# Altium PCB Main.PcbDoc
Units mm, origin at the board's own origin, x right, y up, seen from the top; angles counter-clockwise.
Board outline 42.29 x 27.05 mm, 2 copper layers (Top Layer, Bottom Layer); 18 components, 12 nets, 48 pads, 0 vias.
Unrouted connection lines stored in the file: 34.
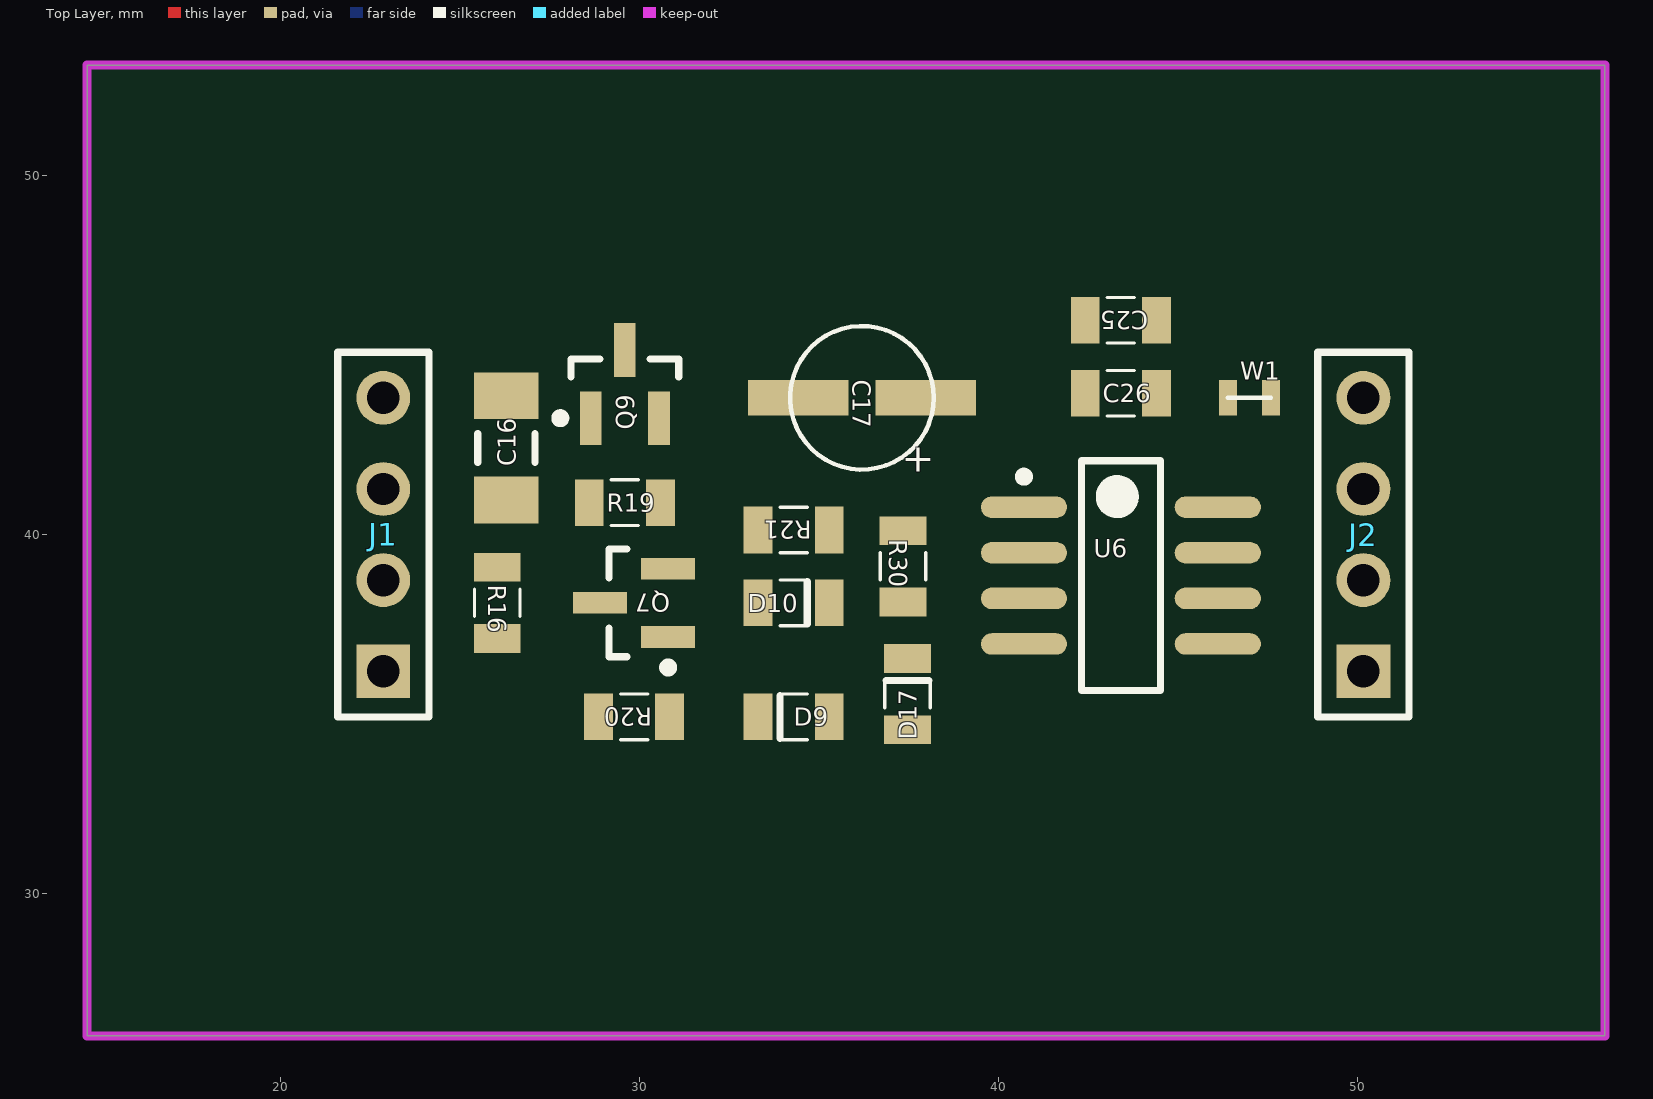
[diagram p0: Top Layer view]
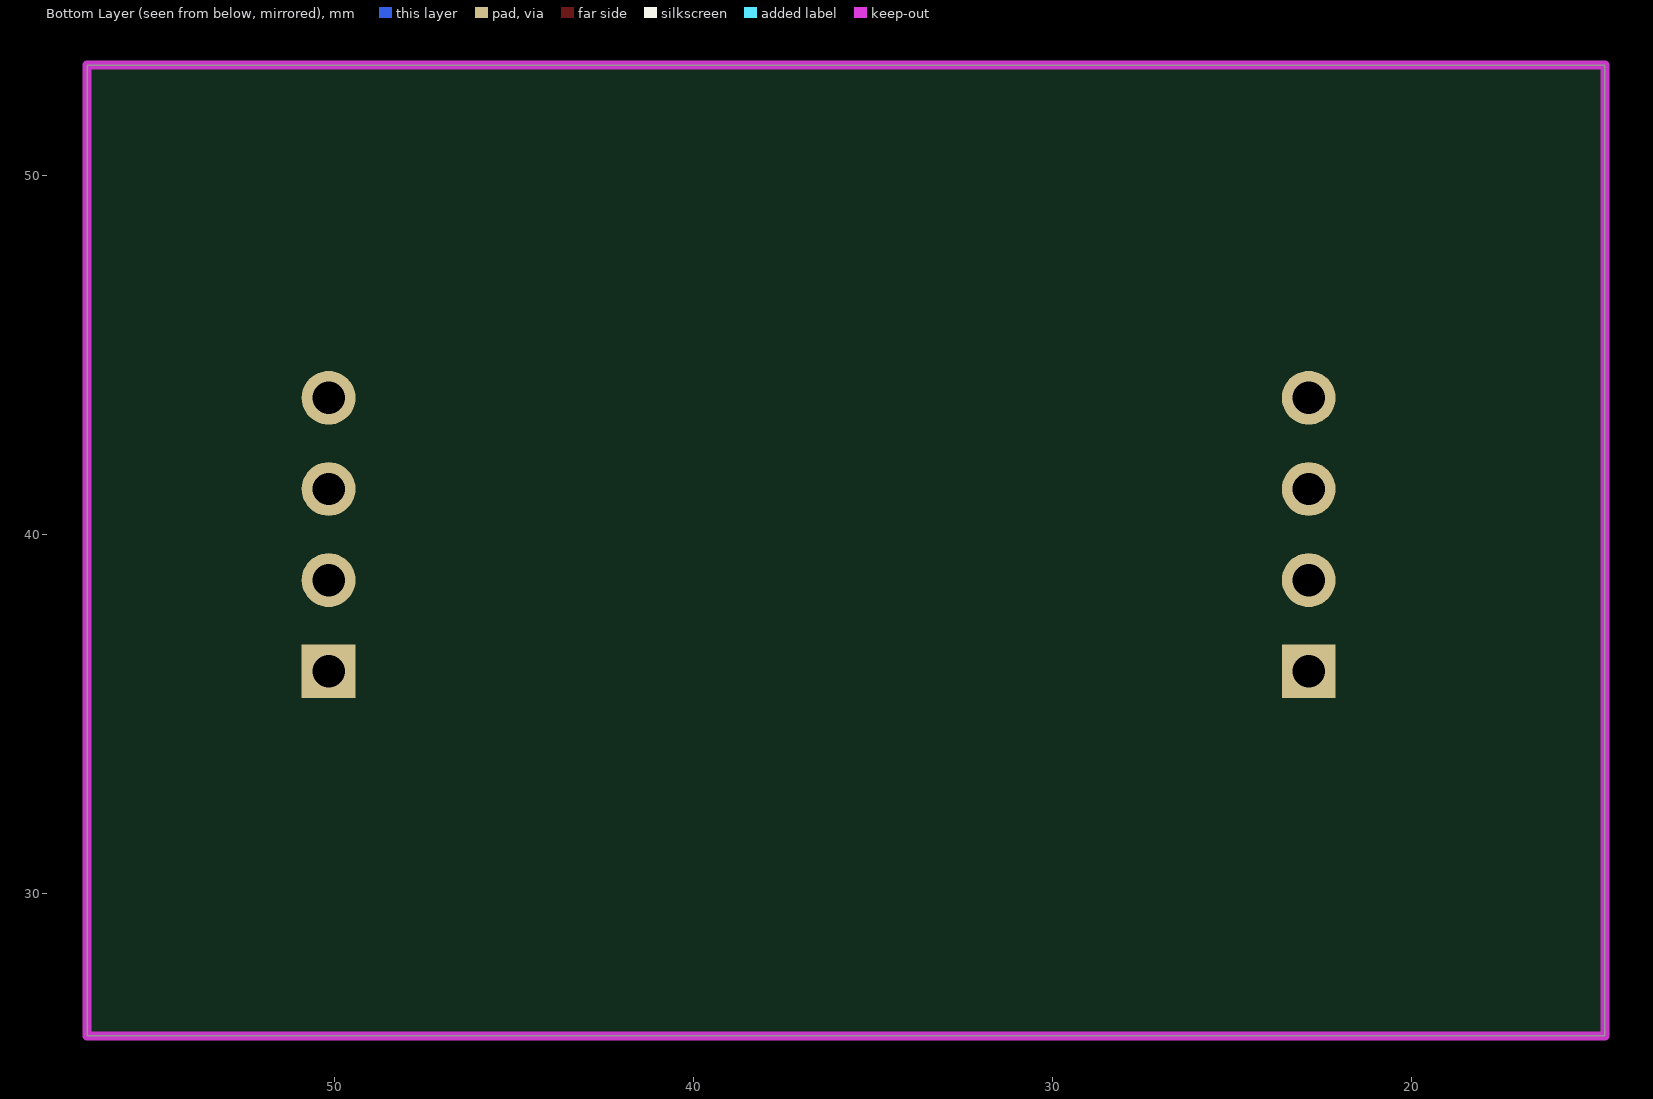
[diagram p1: Bottom Layer view, seen from below]

## Layer stack, top to bottom
Top Solder: solder mask 0.0102, Solder Resist, Dk 3.5
Top Layer: signal copper 0.0356
Dielectric 1: dielectric 0.32, FR-4, Dk 4.8
Bottom Layer: signal copper 0.0356
Bottom Solder: solder mask 0.0102, Solder Resist, Dk 3.5

## Board outline
14.605,26.035 56.896,26.035 56.896,53.086 14.605,53.086

## Design rules (kind name [scope] priority, off if disabled: settings)
Clearance [All] p1: gap=0.3
ComponentClearance [All] p1 off: gap=0 collisioncheckmode=3 verticalgap=0 showdistances=FALSE
Height [All] p1: minheight=0 maxheight=50 prefheight=12.7
PolygonConnect [All] p1: connectstyle=Relief reliefconductorwidth=0.254 reliefentries=4 polygonreliefangle="90 Angle" airgapwidth=0.254
RoomDefinition Main1 [InComponentClass('Main1')] p1: confinementstyle=ConfineIn formatcopy=TRUE lockcomponents=FALSE outline 21.565,30.734 49.759,30.734 49.759,48.006 21.565,48.006
RoutingVias [All] p1: holewidth=0.711 width=1.27 viastyle="Through Hole" minholewidth=0.711 minwidth=1.27 maxholewidth=0.711 maxwidth=1.27
SolderMaskExpansion [All] p1: expansion=0.102
Width [All] p1: maxlimit=0.3 minlimit=0.3 preferedwidth=0.3
28 further rules are at their usual default settings.

## Components (designator, comment, footprint, x,y, rotation, side; value= is the part's Value field where it differs from the comment)
C16 "220nF" RESC3216N 26.289,42.418 r90 top
C17 "22uF" Cap_B 36.195,43.815 r180 top
C25 "1uF" 0805 43.409,45.974 r0 top
C26 "100nF" 0805 43.409,43.942 r0 top
D9 "YELLOW" 0805_Diode 34.29,34.925 r180 top
D10 "Diode" 0805_Diode 34.29,38.1 r0 top
D17 "1N4148" 0805_Diode 37.465,35.56 r90 top
J1 "4PIN" HDR1X4 22.86,36.195 r90 top
J2 "4PIN" HDR1X4 50.165,36.195 r90 top
Q7 "NPN" SOT23-3N 29.845,38.1 r180 top
Q9 "BC847" SOT23-3N 29.591,44.196 r90 top
R16 "10K" 0805 26.035,38.1 r270 top
R19 "4.7K" 0805 29.591,40.894 r0 top
R20 "330" 0805 29.845,34.925 r180 top
R21 "1K" 0805 34.29,40.132 r180 top
R30 "100K" 0805 37.338,39.116 r270 top
U6 "LMC555CN" SOP127P636-8N 43.409,38.862 r0 top
W1 "Jumper 2pin" Jumper_SMD 46.99,43.815 r0 top

## Footprints (in the part's own frame and the unit in brackets; to place one, negate y for a bottom-side part, rotate by r counter-clockwise, add the part's x,y. Pads: shape width x height; smd on the part's side, far side on the other; paste and mask are expansions set on the pad)
0805 [mm] "Chip Resistor, Body 2.0x1.3mm, IPC Medium Density"
  rect 0.8x1.3 smd: 1(-0.991,0) 2(0.991,0)
  silkscreen extent -0.38,-0.64 0.38,0.64, body extent -1.07,-0.7 1.07,0.7, height 0.65
0805_Diode [mm] "Chip Resistor, Body 2.0x1.3mm, IPC Medium Density"
  rect 0.8x1.3 smd: 1(-0.991,0) 2(0.991,0)
  silkscreen extent -0.38,-0.64 0.38,0.64, body extent -1.07,-0.7 1.07,0.7, height 0.65
Cap_B [mm] "SMD"
  rect 2.8x1 smd: 1(-1.778,0) 2(1.778,0)
  silkscreen extent -2,-2 2,2
HDR1X4 [mm]
  rect 1.5x1.5 hole 0.9: 1(0,0)
  round 1.5 hole 0.9: 2(2.54,0) 3(5.08,0) 4(7.62,0)
  silkscreen extent -1.27,-1.27 8.89,1.27
Jumper_SMD [mm]
  rect 0.5x1 smd: 1(-0.6,0) 2(0.6,0)
  silkscreen extent -0.6,0 0.6,0
RESC3216N [mm] "Chip Resistor, Body 3.2x1.6mm, IPC Medium Density"
  rect 1.3x1.8 smd: 1(-1.45,0) 2(1.45,0)
  silkscreen extent -0.4,-0.8 0.4,0.8, body extent -1.68,-0.87 1.68,0.87, height 0.71
SOP127P636-8N [mm] "SOP, 8-Leads, Body 6x4.7mm, Pitch 1.27mm, IPC Medium Density"
  oval 2.4x0.6 smd: 1(-2.7,1.905) 2(-2.7,0.635) 3(-2.7,-0.635) 4(-2.7,-1.905) 5(2.7,-1.905) 6(2.7,-0.635) 7(2.7,0.635) 8(2.7,1.905)
  silkscreen extent -2.82,-3.2 1.1,3.2, body extent -2.36,-3.17 2.36,3.17, height 1.5
SOT23-3N [mm] "SOT23, 3-Leads, Body 2.9x1.3mm, Pitch 0.95mm, Lead Span 2.5mm, IPC Medium Density"
  rect 1.5x0.6 smd: 1(-0.95,0.95) 2(-0.95,-0.95) 3(0.95,0)
  silkscreen extent -1.07,-1.5 0.7,1.92, body extent -0.7,-1.5 0.7,1.5, height 1.1

## Part data
C16 C25 C26: library part Cap, "Capacitor"
C17: library part "Cap Pol1", "Polarized Capacitor (Radial)"
D9: library part LED, "Typical INFRARED GaAs LED"
D10: "Default Diode"
D17: library part Diode, "Default Diode"
J1 J2: library part "Header 4", "Header, 4-Pin"
Q7: library part BC847, "Silicon Bipolar Transistor"
Q9: "Silicon Bipolar Transistor"
R16 R19 R20 R21 R30: library part Res1, "Resistor"
U6: "CMOS Timer, 8-pin MDIP"
W1: "Jumper Wire"

## Nets (pads, with @x,y where several pads share a name; then routed paths per layer and width w, separated by ;. In a path a pad name is that pad's centre, name@x,y a point inside that pad or via, vN(x,y) a via of type N, cw(c..) or ccw(c..) an arc to the next point about the centre after c; other vN are vias at no path point)
GND: C17.2 C25.1 C26.1 J1.1 J2.1 Q7.2 Q9.2 R19.2 U6.1
NetC16_2: C16.2 Q9.1 R19.1
NetC17_1: C17.1 Q9.3 R21.1 R30.1 U6.2 U6.6
NetD9_2: D9.2 R20.1
NetD10_1: D10.1 R21.2
NetD10_2: D10.2 D17.2 R30.2 U6.3
NetD17_1: D17.1 W1.1
NetQ7_1: Q7.1 R16.2
NetQ7_3: Q7.3 R20.2
OUT: J1.4 J2.4 W1.2
RESET: C16.1 J1.3 J2.3 R16.1
VCC: C25.2 C26.2 D9.1 J1.2 J2.2 U6.4 U6.8
pads on no net: U6.5 U6.7

## Keep-outs
Keep-Out Layer:
  the board outline again, w0.254

## Text inside footprints (layer, text, board x,y; h text height)
C17: Top Overlay "+" at 38.227,42.418 h0.8 r180